# EAGLE board lcd-i2c (EAGLE 6.4)
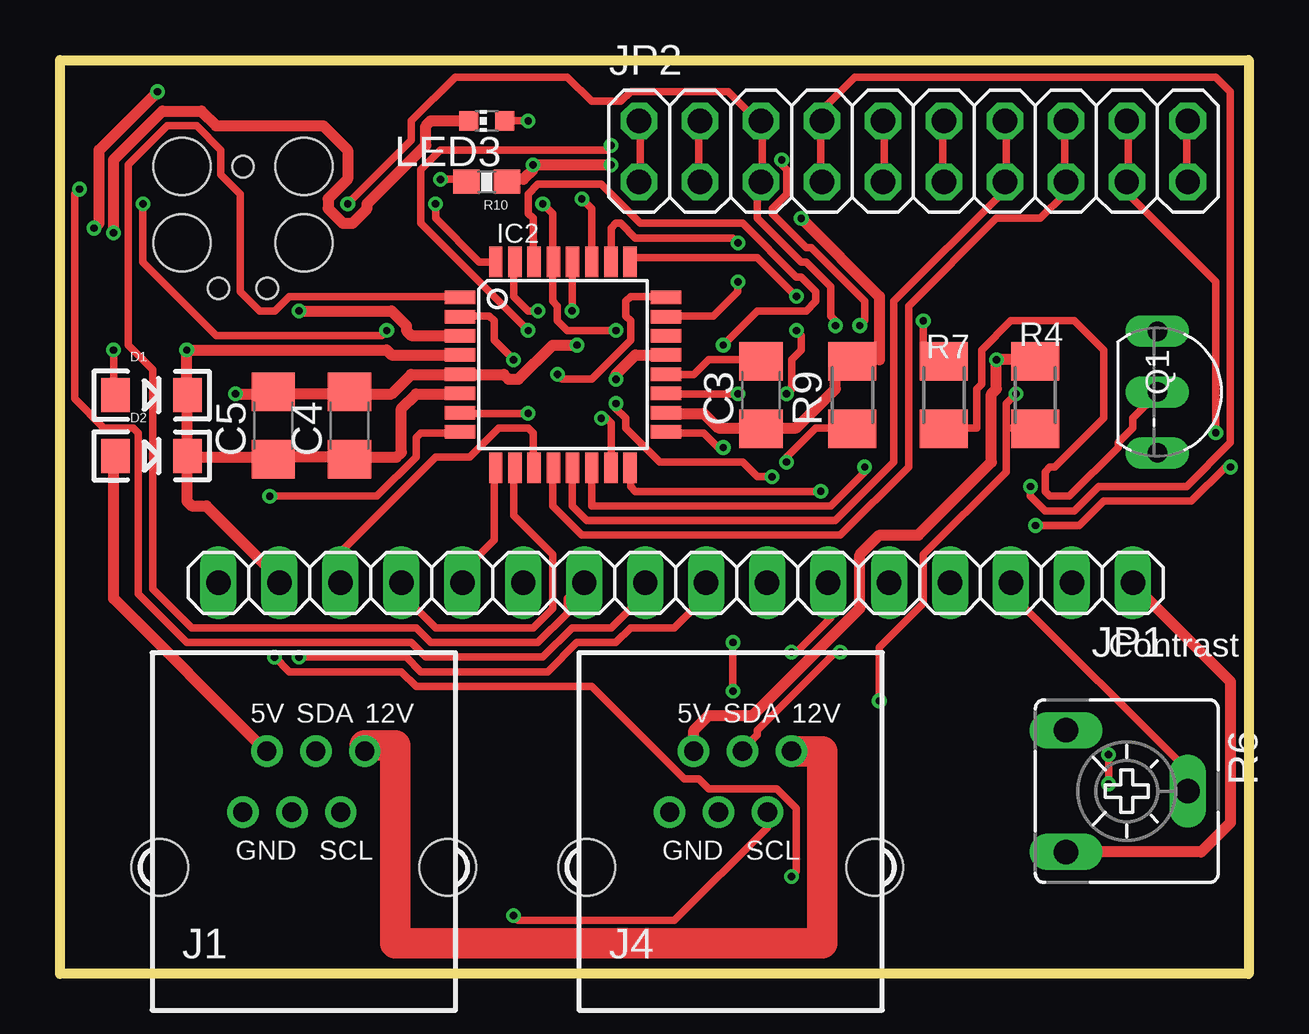
[diagram p0: board, top side]
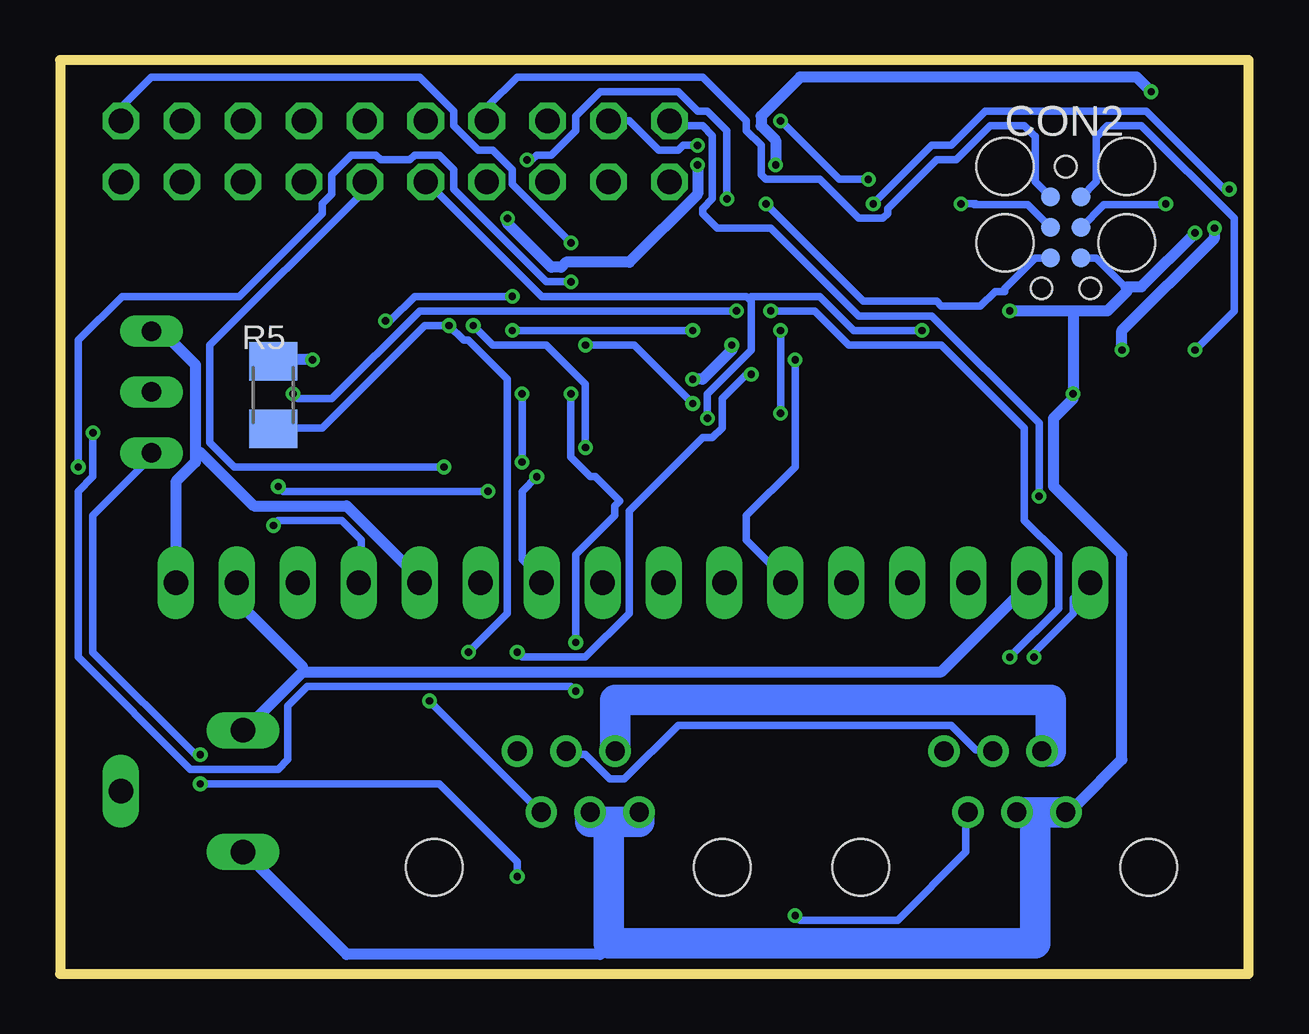
[diagram p1: board, bottom side, seen from below]

Size 49.53 x 38.1 mm. Coordinates in mm from the lower left corner, seen from the top.
Outline: 0,0 0,38.1 49.53,38.1 49.53,0 0,0
Copper layers (1*16): Top 0.035mm / dielectric 1.5mm / Bottom 0.035mm
Design rules "Fusion_eagle_rule_v1.1": minimum track width 6mil, minimum drill 12mil, track to track 6mil, track to pad 6mil, pad to pad 6mil, via to via 6mil, smd to smd 0mil, copper to edge 10mil, drill to drill 10mil, minimum pad ring 10mil, minimum via ring 6mil, stop-mask expansion 2mil, vias tented up to drill 100mil, thermal gap 10mil
Net classes: 0 default: width 0.305 mm; 1 power: width 0.457 mm; 2 i2c: width 0.305 mm
vRestrict: area 15.2,19 to 26.7,22.9; area 15.2,27.9 to 26.7,31.8; area 14.6,19.7 to 18.4,31.1; area 23.5,19.7 to 27.3,31.1; area 5.1,27.9 to 10.2,34.3
Milling: 4 lines

## Footprints (pad centres in the part's own frame; a part is rotated, then mirrored left to right if it is on the bottom)
C1206 = smd 1.6 x 1.8: 1 -1.4,0; 2 1.4,0
TC2030-MCP = smd 0.787 x 0.787: 5V 1.27,0.635; GND 3.81,0.635; MISO 1.27,-0.635; MOSI 2.54,0.635; RESET 3.81,-0.635; SCK 2.54,-0.635 | hole 0.889: 0,0; 5.08,-1.016; 5.08,1.016 | hole 2.375: 0,2.54; 0,-2.54; 3.175,-2.54; 3.175,2.54
LED-1206 = smd 1.2 x 1.4: A -1.5,0; C 1.5,0
TQFP32-08 = smd 1.27 x 0.559: 1 -4.293,2.8; 2 -4.293,2; 3 -4.293,1.2; 4 -4.293,0.4; 5 -4.293,-0.4; 6 -4.293,-1.2; 7 -4.293,-2; 8 -4.293,-2.8; 17 4.293,-2.8; 18 4.293,-2; 19 4.293,-1.2; 20 4.293,-0.4; 21 4.293,0.4; 22 4.293,1.2; 23 4.293,2; 24 4.293,2.8 | smd 0.559 x 1.27: 9 -2.8,-4.293; 10 -2,-4.293; 11 -1.2,-4.293; 12 -0.4,-4.293; 13 0.4,-4.293; 14 1.2,-4.293; 15 2,-4.293; 16 2.8,-4.293; 25 2.8,4.293; 26 2,4.293; 27 1.2,4.293; 28 0.4,4.293; 29 -0.4,4.293; 30 -1.2,4.293; 31 -2,4.293; 32 -2.8,4.293
RJ12-RIGHTANGLE-I2C = drill 0.8 pad 1.3: +5V -1.54,4.84; +12V 2.54,4.84; GND1 -2.54,2.3; GND2 -0.5,2.3; SCL 1.54,2.3; SDA 0.5,4.84 | hole 2.36: -6,0; 6,0
1X16 = drill 1.016 long: 1 -19.05,0; 2 -16.51,0; 3 -13.97,0; 4 -11.43,0; 5 -8.89,0; 6 -6.35,0; 7 -3.81,0; 8 -1.27,0; 9 1.27,0; 10 3.81,0; 11 6.35,0; 12 8.89,0; 13 11.43,0; 14 13.97,0; 15 16.51,0; 16 19.05,0
2X10 = drill 1.016 octagon: 1 -11.43,-1.27; 2 -11.43,1.27; 3 -8.89,-1.27; 4 -8.89,1.27; 5 -6.35,-1.27; 6 -6.35,1.27; 7 -3.81,-1.27; 8 -3.81,1.27; 9 -1.27,-1.27; 10 -1.27,1.27; 11 1.27,-1.27; 12 1.27,1.27; 13 3.81,-1.27; 14 3.81,1.27; 15 6.35,-1.27; 16 6.35,1.27; 17 8.89,-1.27; 18 8.89,1.27; 19 11.43,-1.27; 20 11.43,1.27
CHIP-LED0603 = smd 0.8 x 0.8: A 0,-0.75; C 0,0.75
TO92-EBC = drill 0.813 long: B 0,-1.27; C 2.54,-1.27; E -2.54,-1.27
M1206 = smd 1.6 x 2: 1 -1.4,0; 2 1.4,0
CA6V = drill 1.016 long: A -2.54,-2.54; E 2.54,-2.54; S 0,2.54
0603-RES = smd 1.1 x 1: 1 -0.85,0; 2 0.85,0

## Placement (x,y rotation side)
C3  0.1uF  [C1206]  29.21,24.13 90 top
C4  0.1uF  [C1206]  12.06,22.86 90 top
C5  10uF  [C1206]  8.89,22.86 90 top
CON2  [TC2030-MCP]  7.62,33.66 270 bottom
D1  1N581D1206  [LED-1206]  3.81,24.13 0 top
D2  1N581D1206  [LED-1206]  3.81,21.59 0 top
IC2  MEGA8-AI  [TQFP32-08]  20.95,25.4 0 top
J1  RJ12RIGHTANGLE-I2C  [RJ12-RIGHTANGLE-I2C]  10.16,4.45 0 top
J4  RJ12RIGHTANGLE-I2C  [RJ12-RIGHTANGLE-I2C]  27.94,4.45 0 top
JP1  [1X16]  25.65,16.31 180 top
JP2  [2X10]  35.56,34.29 0 top
LED3  [CHIP-LED0603]  17.78,35.56 90 top
Q1  BC349  [TO92-EBC]  46.99,24.26 270 top
R4  EMPTY  [M1206]  40.64,24.13 90 top
R5  EMPTY  [M1206]  40.64,24.13 90 bottom
R6  10k  [CA6V]  44.45,7.62 270 top
R7  10k  [M1206]  36.83,24.13 270 top
R9  10k  [M1206]  33.02,24.13 90 top
R10  10k  [0603-RES]  17.78,33.02 180 top

## Library data of the parts
C3-C5 R9 = resistor
CON2 D1 D2 J1 J4 = lpatiny
IC2 = atmel; MPN: ATMEGA8-16AU; OC_FARNELL: 9171371; OC_NEWARK: 73M8863
JP1 JP2 = pinhead
LED3 R4 R5 R7 = adafruit
Q1 = transistor
R6 = pot
R10 = SparkFun

## Nets
5V_A [i2c]: CON2.5V D1.A
5V_B [power]: D2.A J1.+5V J4.+5V R4.2 R5.2
+5V [power]: C3.1 C4.1 C5.1 D1.C D2.C IC2.4 IC2.6 IC2.18 JP1.2 JP1.15 R6.A R9.2 R10.1
A3: IC2.26 JP2.19 JP2.20
A6: IC2.19 JP2.17 JP2.18
A7: IC2.22
D0: IC2.30 JP1.7
D1: IC2.31 JP1.8
D2: IC2.32 JP1.9
D3: IC2.1 JP1.10
D4: IC2.2 JP1.11
D5: IC2.9 JP1.12
D6: IC2.10 JP1.13
D7: IC2.11 JP1.14
D8: IC2.12 JP2.15 JP2.16
D9: IC2.13 JP2.13 JP2.14
D10: IC2.14 JP2.11 JP2.12
E: IC2.24 JP1.6
GND [power]: C4.2 C5.2 CON2.GND IC2.3 IC2.5 IC2.21 J1.GND1 J1.GND2 J4.GND1 J4.GND2 JP1.1 JP1.5 LED3.C Q1.E R6.E
LITE: IC2.25 R7.1
MISO: CON2.MISO IC2.16 JP2.7 JP2.8
MOSI: CON2.MOSI IC2.15 JP2.9 JP2.10
N$6: C3.2 IC2.20
N$7: JP1.16 Q1.C
N$9: Q1.B R7.2
N$10: JP1.3 R6.S
N$13: J1.+12V J4.+12V
N$15: LED3.A R10.2
RESET: CON2.RESET IC2.29 R9.1
RS: IC2.23 JP1.4
SCK: CON2.SCK IC2.17 JP2.5 JP2.6
SCL [i2c]: IC2.28 J1.SCL J4.SCL R4.1
SDA [i2c]: IC2.27 J1.SDA J4.SDA R5.1
XTAL1: IC2.7 JP2.3 JP2.4
XTAL2: IC2.8 JP2.1 JP2.2

## Tracks (layer width: path | path; a pad name or v marks a point on that pad's centre or on a via)
5V_A  (via drill 0.3)
  Top 0.305: v2.23,26.01 2.23,24.18 D1.A
  Bottom 0.305: CON2.5V 6.35,33.02 6.35,34.92 6.3,34.95 5.89,35.36 4.47,35.36 0.61,31.5 0.61,27.64 v2.23,26.01
5V_B  (via drill 0.3)
  Top 0.457: R4.2 40.64,25.6 v39.01,25.6 39.01,24.38 38.81,24.18 38.81,21.34 35.76,18.29 34.14,18.29 33.33,17.48 33.33,15.24 28.85,10.77 27.03,10.77 26.42,10.16 26.42,9.35 J4.+5V | D2.A 2.23,21.54 2.23,15.65 8.53,9.35 J1.+5V
  Bottom 0.457: v39.01,25.6 40.64,25.6 R4.2
  Bottom 1.27: J1.+5V 8.26,9.29 8.26,11.43 26.4,11.43 J4.+5V
+5V  (via drill 0.3)
  Top 0.457: IC2.18 25.4,23.37 26.82,23.37 27.43,22.76 29.06,22.76 C3.1 29.26,22.76 30.68,22.76 32.31,24.38 32.31,25.6 32.92,25.6 R9.2 33.12,25.6 34.14,25.6 34.14,28.25 v30.89,31.5 | IC2.6 16.66,24.18 14.83,24.18 14.22,23.57 14.22,21.74 14.02,21.54 12.19,21.54 C4.1 11.99,21.54 8.94,21.54 C5.1 8.74,21.54 5.49,21.54 D2.C | v4.06,36.78 1.63,34.34 1.63,31.29 v1.42,31.09 | R10.1 18.69,33.12 19.3,33.12 19.71,33.53 v19.71,33.73 v22.96,33.73 | IC2.4 13.82,25.81 13.61,26.01 v5.28,26.01 5.28,24.18 D1.C 5.28,23.98 5.28,21.74 D2.C | JP1.15 9.14,16.46 6.1,19.51 5.49,19.51 5.28,19.71 5.28,21.54 D2.C
  Bottom 0.457: v19.71,33.73 19.71,34.75 20.32,35.36 20.32,35.76 18.69,37.39 4.67,37.39 v4.06,36.78 | v1.42,31.09 1.42,30.68 5.28,26.82 v5.28,26.01 | v30.89,31.5 30.89,31.29 29.06,29.46 28.65,29.46 28.45,29.67 25.81,29.67 22.96,32.51 v22.96,33.73 | 39.42,12.6 12.8,12.6 9.14,16.26 JP1.15 | 39.42,12.6 41.86,10.16 R6.A | 39.42,12.6 39.42,12.8 42.06,15.44 42.06,16.26 JP1.2
A3  (via drill 0.3)
  Top 0.305: JP2.20 46.94,35.56 46.94,33.12 JP2.19 | v28.25,30.48 28.04,30.68 23.98,30.68 23.37,31.29 23.16,31.29 22.96,31.09 22.96,29.87 IC2.26
  Bottom 0.305: v28.25,30.48 30.68,32.92 30.68,33.53 31.5,34.34 32.11,34.34 33.12,35.36 33.12,35.97 34.54,37.39 45.72,37.39 46.94,36.17 46.94,35.56 JP2.20
A6  (via drill 0.3)
  Top 0.305: JP2.18 44.5,35.56 44.5,33.12 JP2.17 44.5,32.92 44.5,32.51 48.16,28.85 v48.16,22.55 | v28.25,24.18 25.4,24.18 IC2.19 | v28.04,11.79 v28.04,13.82
  Bottom 0.305: v28.25,24.18 28.25,21.54 27.43,20.73 27.23,20.73 26.21,19.71 26.42,19.51 26.42,19.1 28.04,17.48 v28.04,13.82 | v28.04,11.79 28.25,11.99 39.22,11.99 40.03,11.18 40.03,8.94 40.44,8.53 44.09,8.53 48.77,13.21 48.77,20.12 48.16,20.73 v48.16,22.55
D0  (via drill 0.3)
  Top 0.305: v29.67,20.73 29.06,20.73 28.45,21.34 24.99,21.34 23.57,22.76 23.57,23.16 23.16,23.57 v23.16,23.77 | v27.64,26.21 29.06,27.64 31.09,27.64 31.5,28.04 31.5,28.45 30.89,29.06 30.68,29.06 28.45,31.29 24.18,31.29 22.55,32.92 19.91,32.92 19.51,32.51 19.51,31.7 19.71,31.5 19.71,29.87 IC2.30
  Bottom 0.305: v29.67,20.73 30.28,20.12 30.28,17.27 29.46,16.46 JP1.7 | v23.16,23.77 25.6,26.21 v27.64,26.21
D1  (via drill 0.3)
  Top 0.305: v19.91,27.64 19.51,27.64 18.9,28.25 18.9,29.67 IC2.31 | v9.96,13.21 14.43,13.21 15.04,12.6 20.32,12.6 21.54,13.82 23.16,13.82 23.77,14.43 25.6,14.43 26.82,15.65 26.82,16.26 JP1.8
  Bottom 0.305: v19.91,27.64 18.09,27.64 16.66,26.21 12.8,26.21 9.35,22.76 9.35,18.9 7.92,17.48 7.92,15.24 v9.96,13.21
D2  (via drill 0.3)
  Top 0.305: v15.65,32.11 15.65,31.5 17.48,29.67 18.09,29.67 IC2.32 | v0.81,32.72 0.61,32.51 0.61,23.98 1.83,22.76 3.05,22.76 3.25,22.55 3.25,15.85 5.28,13.82 14.63,13.82 15.24,13.21 20.12,13.21 21.34,14.43 22.96,14.43 24.38,15.85 JP1.9
  Bottom 0.305: v15.65,32.11 13.21,34.54 12.39,34.54 10.97,35.97 4.27,35.97 1.02,32.72 v0.81,32.72
D3
  Top 0.305: IC2.1 16.66,28.25 9.55,28.25 8.94,27.64 8.33,27.64 7.52,28.45 7.52,32.51 6.71,33.33 6.71,34.34 5.69,35.36 4.47,35.36 2.85,33.73 2.85,26.21 3.86,25.2 3.86,16.05 5.49,14.43 14.83,14.43 15.44,13.82 19.91,13.82 21.13,15.04 21.13,15.65 21.74,16.26 JP1.10
D4  (via drill 0.3)
  Top 0.305: v18.9,25.6 18.09,26.42 18.09,27.23 17.88,27.43 16.66,27.43 IC2.2
  Bottom 0.305: v18.9,25.6 18.9,21.13 20.93,19.1 20.93,18.09 19.3,16.46 JP1.11
D5
  Top 0.305: IC2.9 18.09,20.93 18.09,18.09 16.87,16.87 16.87,16.46 JP1.12
D6
  Top 0.305: JP1.13 14.22,15.85 15.65,14.43 19.71,14.43 20.52,15.24 20.52,17.48 18.9,19.1 18.9,20.93 IC2.10
D7
  Top 0.305: JP1.14 11.79,16.46 11.79,17.68 15.65,21.54 17.07,21.54 18.29,22.76 19.51,22.76 19.71,22.55 19.71,21.13 IC2.11
D8
  Top 0.305: IC2.12 20.52,20.93 20.52,19.51 21.74,18.29 32.51,18.29 35.36,21.13 35.36,27.84 39.01,31.5 40.84,31.5 41.86,32.51 41.86,32.92 JP2.15 41.86,33.12 41.86,35.56 JP2.16
D9
  Top 0.305: IC2.13 21.34,20.93 21.34,19.51 21.95,18.9 32.31,18.9 34.75,21.34 34.75,28.04 39.22,32.51 39.22,32.92 JP2.13 39.42,33.12 39.42,35.56 JP2.14
D10  (via drill 0.3)
  Top 0.305: v33.53,21.13 33.53,20.93 32.11,19.51 22.15,19.51 22.15,20.93 IC2.14 | JP2.12 36.78,35.56 36.78,33.12 JP2.11
  Bottom 0.305: v33.53,21.13 42.27,21.13 43.28,22.15 43.28,26.21 36.98,32.51 36.98,32.92 JP2.11
E  (via drill 0.3)
  Top 0.305: v20.73,24.99 20.93,24.79 22.15,24.79 23.77,26.42 23.77,27.23 23.57,27.43 23.57,28.04 23.77,28.25 25.2,28.25 IC2.24 | v30.48,13.41 30.68,13.41 32.11,14.83 32.11,16.26 JP1.6
  Bottom 0.305: v20.73,24.99 20.93,24.99 21.95,23.98 21.95,22.76 22.35,22.35 22.76,22.35 25.81,19.3 25.81,15.04 27.64,13.21 30.28,13.21 v30.48,13.41
GND  (via drill 0.3)
  Top 0.457: 25.4,25.81 IC2.21 25.2,25.81 23.98,25.81 23.16,24.99 v23.16,24.79 | IC2.5 | IC2.5 16.46,24.99 14.63,24.99 13.82,24.18 12.19,24.18 C4.2 11.99,24.18 8.94,24.18 C5.2 8.74,24.18 v7.32,24.18 | v21.54,26.21 20.52,26.21 19.1,24.79 18.69,24.79 18.49,24.99 16.87,24.99 IC2.5 | 16.66,26.62 IC2.3 16.46,26.62 14.63,26.62 14.43,26.82 14.43,27.03 13.82,27.64 v9.96,27.64 | LED3.C 15.44,35.56 15.24,35.36 15.24,34.54 12.8,32.11 12.8,31.9 12.19,31.29 11.79,31.29 11.18,31.9 11.18,32.31 11.99,33.12 11.99,34.34 10.97,35.36 6.5,35.36 5.89,35.97 4.27,35.97 2.23,33.93 v2.23,30.89 | R6.E 47.55,5.08 48.77,6.3 48.77,12.19 44.7,16.26 JP1.1
  Bottom 0.305: CON2.GND 6.35,29.84 5.12,28.61 5.08,28.57
  Bottom 0.457: v23.16,24.79 22.76,24.79 21.54,26.01 v21.54,26.21 | v2.23,30.89 4.47,28.65 5.08,28.65 5.12,28.61 | 7.32,27.64 5.89,27.64 5.08,28.45 5.08,28.57 | 7.32,27.64 v9.96,27.64 | 7.32,27.64 v7.32,24.18 7.32,23.98 8.13,23.16 8.13,20.32 5.28,17.48 5.28,8.94 7.11,7.11 J1.GND1 | R6.E 41.86,5.08 37.59,0.81 27.03,0.81 26.67,1.27 | JP1.1 44.7,20.52 43.89,21.34 43.89,21.74 | 43.89,21.74 43.89,25.4 45.11,26.62 45.72,26.62 Q1.E | JP1.5 34.54,16.46 37.59,19.51 41.45,19.51 43.69,21.74 43.89,21.74
  Bottom 1.27: J1.GND1 J1.GND2 8.89,6.75 8.89,1.27 26.67,1.27 26.67,6.35 | 26.67,6.35 27.44,6.35 J4.GND2 | 26.67,6.35 25.4,6.35 J4.GND1
LITE  (via drill 0.3)
  Top 0.305: v30.68,28.25 29.06,29.87 23.77,29.87 IC2.25 | v35.97,27.23 35.97,25.6 36.78,25.6 R7.1
  Bottom 0.305: v30.68,28.25 34.75,28.25 35.76,27.23 v35.97,27.23
MISO  (via drill 0.3)
  Top 0.305: JP2.7 31.7,33.12 31.7,35.56 JP2.8 31.9,35.56 31.9,36.17 33.12,37.39 48.16,37.39 48.77,36.78 48.77,22.15 46.94,20.32 43.28,20.32 42.27,19.3 41.05,19.3 40.44,19.91 v40.44,20.32 | v31.7,20.12 23.98,20.12 23.77,20.32 23.77,20.93 IC2.16
  Bottom 0.305: CON2.MISO 8.89,33.02 8.89,34.92 8.94,34.95 9.35,35.36 10.77,35.36 12.19,33.93 13.01,33.93 15.04,31.9 15.04,31.7 15.24,31.5 16.26,31.5 17.88,33.12 20.12,33.12 20.32,33.33 20.32,34.54 20.93,35.15 20.93,35.56 22.76,37.39 30.48,37.39 31.7,36.17 31.7,35.56 JP2.8 | v31.7,20.12 40.23,20.12 v40.44,20.32
MOSI  (via drill 0.3)
  Top 0.305: JP2.9 34.34,33.12 34.34,35.56 JP2.10 | v22.55,23.16 22.76,23.16 22.96,22.96 22.96,21.13 IC2.15 | v3.45,32.11 3.45,29.67 6.5,26.62 13.41,26.62 v13.61,26.82
  Bottom 0.305: CON2.MOSI 6.03,32.07 3.49,32.07 v3.45,32.11 | v22.55,23.16 22.55,24.18 20.73,26.01 20.73,28.04 20.83,28.14 | 20.83,28.14 20.93,28.25 29.46,28.25 34.14,32.92 JP2.9 | v13.61,26.82 16.46,26.82 17.88,28.25 20.73,28.25 20.83,28.14
N$6
  Top 0.305: IC2.20 25.4,24.99 26.42,24.99 27.03,25.6 29.06,25.6 C3.2
N$7  (via drill 0.3)
  Top 0.305: v43.69,7.92 v43.69,9.14 | v30.48,4.06 30.68,4.27 30.68,6.91 29.87,7.72 27.03,7.72 26.62,8.13 26.01,8.13 22.15,11.99 14.83,11.99 14.22,12.6 9.55,12.6 v8.94,13.21
  Bottom 0.305: v43.69,9.14 43.89,9.14 48.16,13.41 48.16,19.1 45.72,21.54 Q1.C | v43.69,7.92 33.73,7.92 30.48,4.67 v30.48,4.06 | v8.94,13.21 8.94,13.41 7.32,15.04 7.32,15.65 6.71,16.26 JP1.16
N$9
  Top 0.305: R7.2 36.98,22.76 38.2,22.76 38.2,24.38 38.41,24.59 38.41,26.01 39.62,27.23 42.27,27.23 43.48,26.01 43.48,23.16 41.45,21.13 41.25,21.13 41.05,20.93 41.05,20.12 41.25,19.91 42.06,19.91 44.09,21.95 44.09,22.15 44.7,22.76 44.7,23.16 45.72,24.18 Q1.B
N$10
  Top 0.305: JP1.3 39.62,15.85 46.94,8.53 46.94,7.72 R6.S
N$13
  Top 1.27: J4.+12V 31.75,9.29 31.75,1.27 13.97,1.27 13.97,9.53 12.7,9.53 J1.+12V
N$15  (via drill 0.3)
  Top 0.305: v19.51,35.56 LED3.A | v15.85,33.12 16.87,33.12 R10.2
  Bottom 0.305: v19.51,35.56 17.07,33.12 v15.85,33.12
RESET  (via drill 0.3)
  Top 0.305: v30.28,21.34 30.28,21.54 31.5,22.76 32.92,22.76 R9.1 | v30.28,24.18 30.48,24.38 30.48,25.6 30.89,26.01 30.89,26.62 v30.68,26.82 | v23.16,26.82 21.13,26.82 20.73,27.23 20.73,27.84 20.52,28.04 20.52,29.67 IC2.29 20.52,29.87 20.52,31.7 v20.12,32.11
  Bottom 0.305: CON2.RESET 8.89,29.84 10.16,28.57 10.16,28.45 10.57,28.45 11.18,27.84 12.8,27.84 13.01,28.04 16.05,28.04 v20.12,32.11 | v30.28,24.18 v30.28,21.34 | v23.16,26.82 v30.68,26.82
RS  (via drill 0.3)
  Top 0.305: v28.25,28.85 28.25,28.45 27.23,27.43 25.4,27.43 IC2.23 | v48.77,21.13 48.56,21.13 47.14,19.71 43.48,19.71 42.47,18.69 v40.64,18.69
  Bottom 0.305: v28.25,28.85 29.26,28.85 33.12,32.72 33.12,33.53 33.73,34.14 34.75,34.14 34.95,33.93 36.17,33.93 36.37,34.14 37.39,34.14 38.2,33.33 38.2,32.51 38.61,32.11 38.61,31.7 42.06,28.25 46.94,28.25 48.77,26.42 v48.77,21.13 | v40.64,18.69 40.44,18.9 37.8,18.9 36.98,18.09 36.98,16.46 JP1.4
SCK  (via drill 0.3)
  Top 0.305: v27.64,21.95 27.43,21.95 26.82,22.55 25.4,22.55 IC2.17 | v32.31,27.03 32.31,27.23 32.11,27.43 32.11,28.65 31.09,29.67 30.89,29.67 29.06,31.5 29.06,32.92 JP2.5 29.26,33.12 29.26,35.56 JP2.6 29.06,35.56 27.84,36.78 23.77,36.78 23.37,36.37 22.15,36.37 21.13,37.39 16.46,37.39 14.63,35.56 14.63,34.75 v11.99,32.11
  Bottom 0.305: CON2.SCK 9.21,32.07 11.38,32.07 | 11.38,32.07 11.43,32.07 | v27.64,21.95 27.64,24.59 29.26,26.21 31.5,26.21 v32.31,27.03 | v11.99,32.11 11.38,32.11 11.38,32.07
SCL  (via drill 0.3)
  Top 0.305: v18.9,2.44 19.1,2.23 25.6,2.23 29.46,6.1 29.46,6.71 J4.SCL | v21.34,27.64 21.34,29.67 IC2.28 | v39.83,24.18 39.42,23.77 39.42,22.76 | 39.42,22.76 40.64,22.76 R4.1 | v34.14,11.38 34.14,13.61 35.97,15.44 35.97,17.48 39.42,20.93 39.42,22.76
  Bottom 0.305: v18.9,2.44 18.69,2.23 14.63,2.23 11.79,5.08 11.79,6.71 J1.SCL | v21.34,27.64 34.54,27.64 38.2,23.98 39.62,23.98 v39.83,24.18 | v34.14,11.38 29.67,6.91 J4.SCL
SDA  (via drill 0.3)
  Top 0.305: v21.74,32.31 22.15,31.9 22.15,29.87 IC2.27 | v30.07,33.93 30.07,33.73 30.28,33.53 30.28,32.51 29.67,31.9 29.67,31.7 31.09,30.28 31.29,30.28 33.53,28.04 33.53,27.23 v33.33,27.03 | v32.51,13.41 32.31,13.41 29.06,10.16 29.06,9.96 28.45,9.35 J4.SDA
  Bottom 0.305: J1.SDA 10.77,9.35 11.38,9.35 12.39,10.36 23.77,10.36 26.01,8.13 26.62,8.13 27.64,9.14 28.25,9.14 J4.SDA | v21.74,32.31 21.74,35.15 22.55,35.97 22.96,35.97 23.77,36.78 27.03,36.78 28.04,35.76 28.04,35.15 29.06,34.14 29.67,34.14 29.87,33.93 v30.07,33.93 | R5.1 40.64,22.76 38.61,22.76 34.34,27.03 v33.33,27.03 32.72,26.42 32.51,26.42 30.89,24.79 30.89,15.04 v32.51,13.41
XTAL1  (via drill 0.3)
  Top 0.305: JP2.4 26.62,35.56 26.62,33.12 JP2.3 | v19.51,23.37 16.66,23.37 IC2.7 | v19.51,26.82 15.04,31.29 15.04,33.53 15.85,34.34 22.76,34.34 v22.96,34.54
  Bottom 0.305: v19.51,26.82 v19.51,23.37 | v22.96,34.54 23.57,34.54 23.77,34.34 24.59,34.34 25.81,35.56 JP2.4
XTAL2  (via drill 0.3)
  Top 0.305: JP2.1 24.18,33.12 24.18,35.56 JP2.2 | v8.74,19.91 13.21,19.91 14.83,21.54 14.83,22.35 15.04,22.55 16.66,22.55 IC2.8
  Bottom 0.305: v8.74,19.91 8.74,22.96 13.21,27.43 16.26,27.43 19.91,31.09 22.15,31.09 22.76,31.7 22.76,31.9 22.35,32.31 22.35,34.95 22.76,35.36 23.77,35.36 23.98,35.56 JP2.2

## Text on the board
tPlace: Contrast